# Altium PCB balancer.PcbDoc
Units mil, origin at the board's own origin, x right, y up, seen from the top; angles counter-clockwise.
Board outline 2235 x 3937.01 mil, 2 copper layers (Top Layer, Bottom Layer); 98 components, 77 nets, 398 pads, 157 vias.
Unrouted connection lines stored in the file: 1.
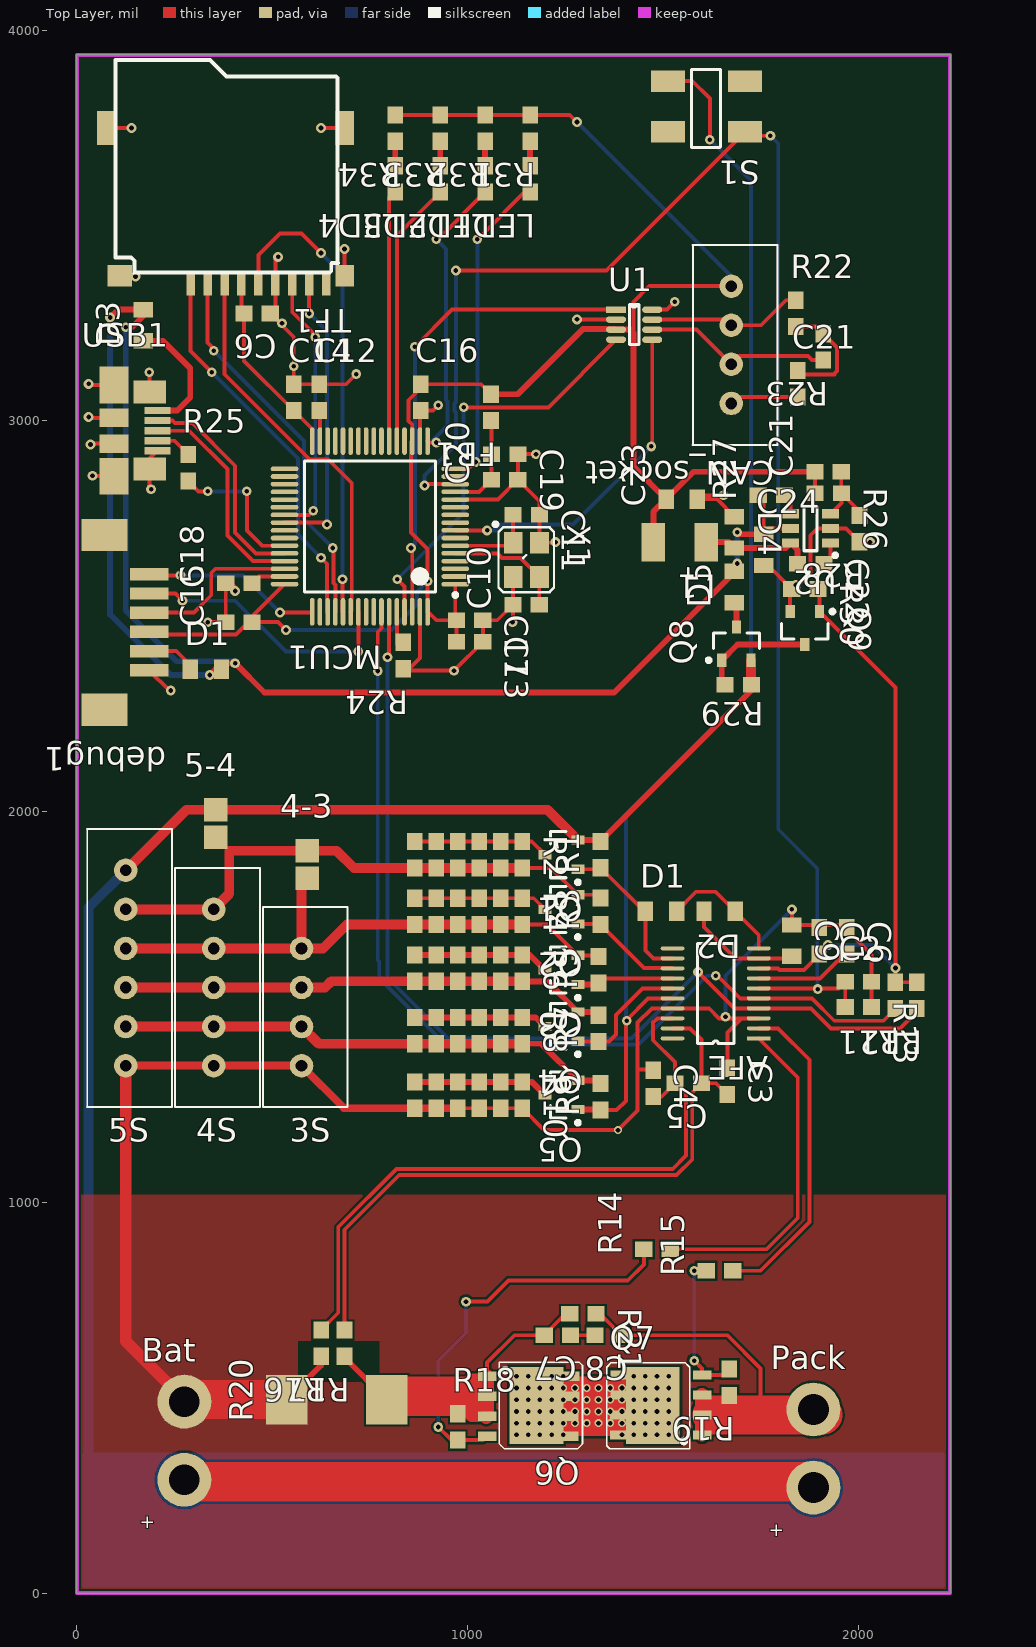
[diagram p0: Top Layer view]
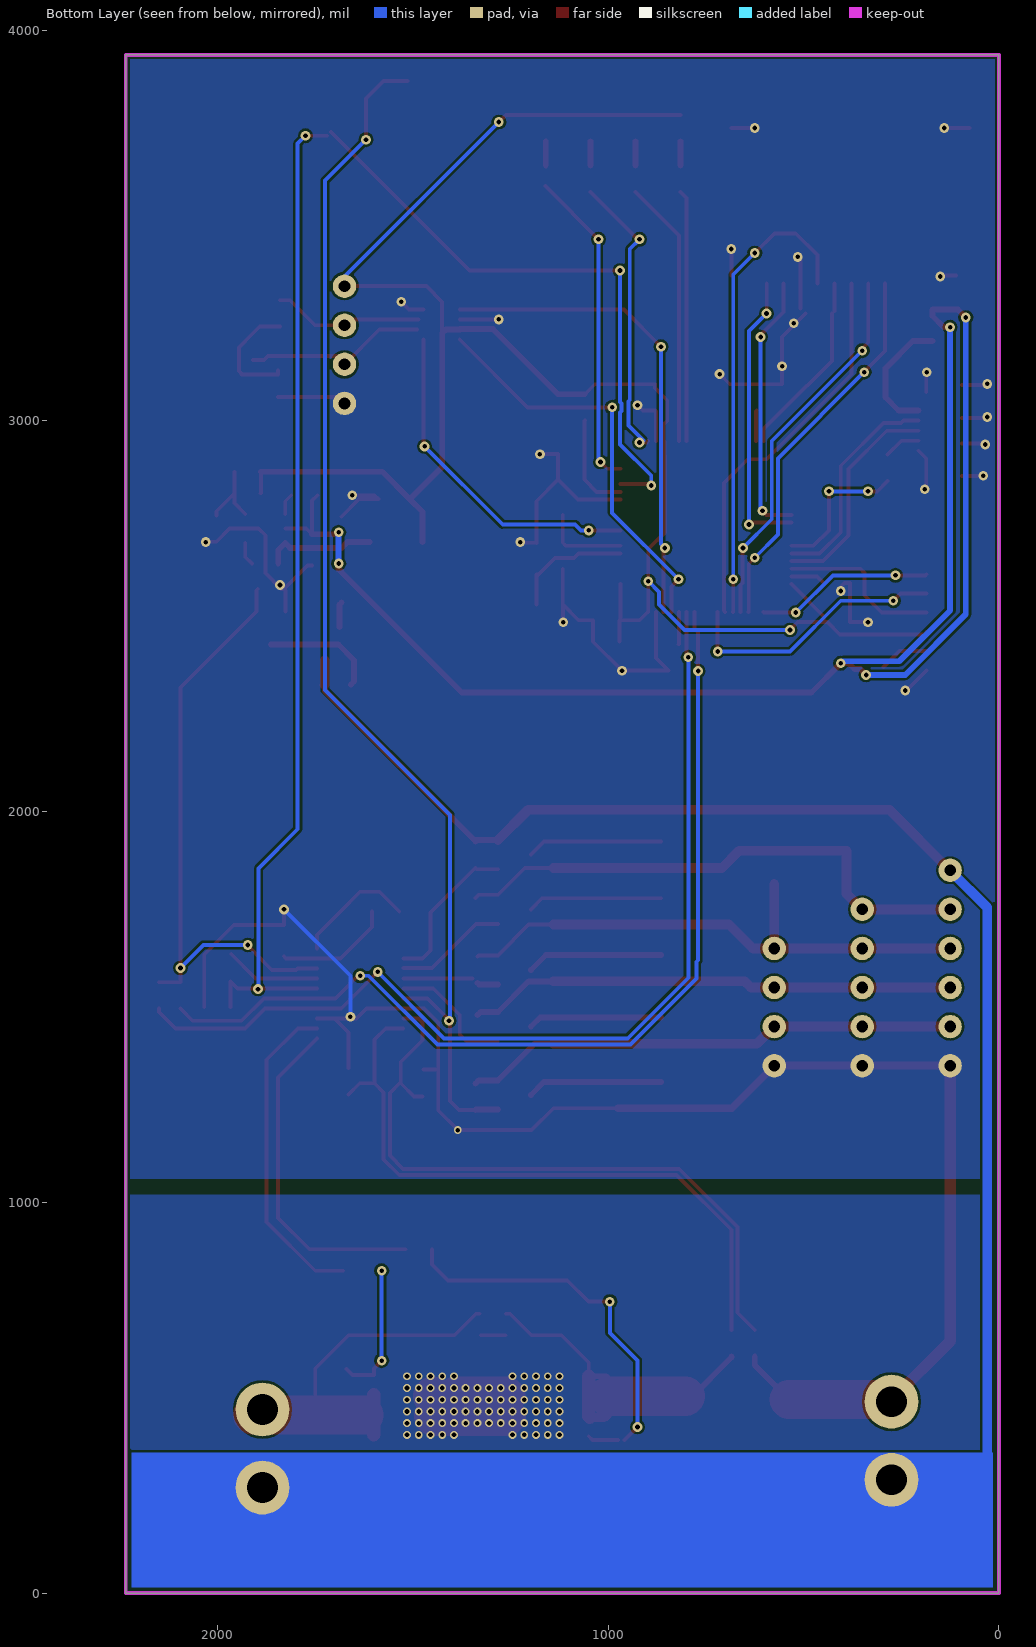
[diagram p1: Bottom Layer view, seen from below]

## Layer stack, top to bottom
Top Solder: solder mask 0.4, Solder Resist, Dk 3.5
Top Layer: signal copper 1.4
Dielectric 1: dielectric 12.6, FR-4, Dk 4.8
Bottom Layer: signal copper 1.4
Bottom Solder: solder mask 0.4, Solder Resist, Dk 3.5

## Board outline
0,0 0,3937.01 2235,3937.01 2235,0

## Design rules (kind name [scope] priority, off if disabled: settings)
Clearance [All] p1: gap=6
DiffPairsRouting [All] p1: maxlimit=10 minlimit=6 mostfreqgap=10 toplayer_minwidth=6 toplayer_maxwidth=15 toplayer_prefwidth=10 bottomlayer_minwidth=6 bottomlayer_maxwidth=15 bottomlayer_prefwidth=10 maxuncoupledlength=500
MinimumSolderMaskSliver [All] p1 off: minsoldermaskwidth=10
PolygonConnect [All] p1: connectstyle=Direct reliefconductorwidth=10 reliefentries=4 polygonreliefangle="90 Angle" airgapwidth=10
RoomDefinition Interface [InComponentClass('Interface')] p1 off: confinementstyle=ConfineIn formatcopy=TRUE lockcomponents=FALSE outline 3985,-40 4470,-40 4470,470 3985,470
RoomDefinition MCU [InComponentClass('MCU')] p2 off: confinementstyle=ConfineIn formatcopy=TRUE lockcomponents=FALSE outline 4270,-15 4435,-15 4435,210 4270,210
RoomDefinition AFE [InComponentClass('AFE')] p3 off: confinementstyle=ConfineIn formatcopy=TRUE lockcomponents=FALSE outline 4105,335 4405,335 4405,715 4105,715
RoutingVias [All] p1: holewidth=12 width=25 viastyle="Through Hole" minholewidth=12 minwidth=25 maxholewidth=28 maxwidth=50
SilkToBoardRegionClearance [All] p1 off:
SilkToSilkClearance [All] p1 off: silktosilkclearance=10
SilkToSolderMaskClearance [IsPad] p1 off: minsilkscreentomaskgap=10 clearancetoexposedcopper=TRUE
SolderMaskExpansion [All] p1: expansion=4
UnpouredPolygon [All] p1: allowunpoured=FALSE
Width [All] p1: maxlimit=100 minlimit=10 preferedwidth=10
24 further rules are at their usual default settings.

## Classes and differential pairs
component class MCU: C6 C10 C11 C12 C13 C14 C15 C16 C17 C18 C19 C20 C21 C22 C23 C24 CAN_socket D1 D3 D4 D5 debug1 FB1 L1 LED1 LED2 LED3 LED4 MCU1 MCU? Q8 Q9 R22 R23 R24 R25 R26 R27 R28 R29 R30 R31 R32 R33 R34 TF1 U1 U2 USB1 X1
component class AFE: AFE C1 C2 C3 C4 C5 C6 C7 C8 C9 D1 D2 Q1 Q2 Q3 Q4 Q5 Q6 Q7 R1 R2 R3 R4 R5 R6 R7 R8 R9 R10 R11 R12 R13 R14 R15 R16 R17 R18 R19 R20 R21 S1
component class Interface: 3S 4-3 4S 5-4 5S Bat Pack
differential pair USB: +USB_P -USB_N
differential pair CAN: +CAN_P -CAN_N

## Components (designator, comment, footprint, x,y, rotation, side; value= is the part's Value field where it differs from the comment)
3S "4PSocket" 4PSocket-s 575,1500 r270 top
4-3 "SW-SPST" "SolderBridge60mil - 2" 590,1830 r270 top
4S "5PSocket" 5PSocket 350,1600 r270 top
5-4 "SW-SPST" "SolderBridge60mil - 2" 355,1935 r270 top
5S "6PSocket" 6PSocket 125,1700 r270 top
AFE "BQ76920" TSSOP20 1635,1535 r180 top
Bat "Battery_AWG12" Battery_AWG12 275,390 r90 top
C1 "1uf" 0603 1900,1670 r270 top
C2 "4.7nF" 0603 2000,1565 r0 top
C3 "0.1uF" 0603 1665,1310 r270 top
C4 "0.1uF" 0603 1475,1305 r270 top
C5 "0.1uF" 0603 1565,1305 r180 top
C6 "0.1uf" 0603 461.54,3275 r180 top
C6 "1uf" 0603 1970,1670 r270 top
C7 "0.1uF" 0603 1230,660 r180 top
C8 "0.1uF" 0603 1360,660 r180 top
C9 "4.7uF" 0805 1830,1670 r270 top
C10 "20pF" 0603 1150,2530 r180 top
C11 "20pF" 0603 1150,2760 r0 top
C12 "2.2uf" 0603 620,3060 r90 top
C13 "0.1uF" 0603 1005,2435 r0 top
C14 "0.1uF" 0603 555,3060 r90 top
C15 "0.1uF" 0603 415,2485 r180 top
C16 "4.7uF" 0603 880,3060 r90 top
C17 "0.1uF" 0603 1005,2490 r0 top
C18 "2.2uf" 0603 415,2585 r180 top
C19 "0.1uF" 0603 1095,2915 r0 top
C20 "4.7uF" 0603 1095,2850 r180 top
C21 "100pF" 0603 1845,3095 r90 top
C21 "22pf" 0603 1923,2870 r180 top
C22 "0.1uF" 0603 1878,2635 r0 top
C23 "22uF" 0805 1548,2800 r180 top
C24 "4.7uF 50V" 0805 1758,2670 r90 top
CAN_socket "4PSocket" 4pSocket-s 1675,3195 r270 top
D1 "Diode" 0805 330,2365 r0 top
D1 "Diode" 0805 1495,1745 r0 top
D2 "Diode" 0805 1645,1745 r180 top
D3 "Diode" 0805 170,3245 r90 top
D4 "Diode" 0805 1683,2715 r270 top
D5 "Diode" 0805 1683,2575 r90 top
debug1 "debug" WFRSM125 185,2460 r270 top
FB1 "FB" 0603 1060,3035 r270 top
L1 "2.2uH" 1210 1543,2690 r180 top
LED1 "LED0" 0603 1160,3620 r270 top
LED2 "LED0" 0603 1045,3620 r270 top
LED3 "LED0" 0603 930,3620 r270 top
LED4 "LED0" 0603 815,3620 r270 top
MCU1 "STM32F103R8T6" LQFP64_N 750,2730 r180 top
Pack "Battery_AWG12" Battery_AWG12 1885,370 r90 top
Q1 "PMOS" SOT-23B_L 1240,1890 r180 top
Q2 "PMOS" SOT-23B_L 1240,1750 r180 top
Q3 "PMOS" SOT-23B_L 1240,1595 r180 top
Q4 "PMOS" SOT-23B_L 1240,1450 r180 top
Q5 "PMOS" SOT-23B_L 1240,1275 r180 top
Q6 "NMOS" BSC025N03MS 1175,480 r180 top
Q7 "NMOS" BSC025N03MS 1475,480 r0 top
Q8 "PMOS" SOT-23B_L 1688,2430 r90 top
Q9 "NMOS" SOT-23B_L 1863,2470 r270 top
R1 "10k" 0603 1340,1890 r90 top
R2 "200R" 0603*6 1030,1890 r270 top
R3 "10k" 0603 1340,1745 r90 top
R4 "200R" 0603*6 1030,1745 r270 top
R5 "10k" 0603 1335,1595 r90 top
R6 "200R" 0603*6 1030,1600 r270 top
R7 "10k" 0603 1335,1445 r90 top
R8 "200R" 0603*6 1030,1440 r270 top
R9 "10k" 0603 1340,1270 r90 top
R10 "200R" 0603*6 1030,1275 r270 top
R11 "10k" 0603 2095,1530 r270 top
R12 "10k" 0603 2150,1530 r270 top
R13 "NTC/10k" 0603 2000,1500 r0 top
R14 "200R" 0603 1485,880 r180 top
R15 "200R" 0603 1645,825 r180 top
R16 "0R" 0603 625,640 r270 top
R17 "0R" 0603 685,640 r270 top
R18 "500K" 0603 975,425 r90 top
R19 "500K" 0603 1670,540 r270 top
R20 "1mR" 2512 665,495 r180 top
R21 "NC" 0603 1295,715 r0 top
R22 "60R" 0603 1840,3275 r90 top
R23 "60R" 0603 1910,3190 r270 top
R24 "10k" 0603 835,2400 r270 top
R25 "10k" 0603 285,2880 r90 top
R26 "40.3k" 0603 1923,2815 r0 top
R27 "10k" 0603 1778,2810 r180 top
R28 "10k" 0603 2003,2725 r270 top
R29 "10k" 0603 1693,2325 r180 top
R30 "10k" 0603 1863,2570 r0 top
R31 "200R" 0603 1160,3750 r270 top
R32 "200R" 0603 1045,3750 r270 top
R33 "200R" 0603 930,3750 r270 top
R34 "200R" 0603 815,3750 r270 top
S1 "SW-PB" SW1 1710,3740 r180 top
TF1 "TF" TF 685,3750 r180 top
U1 "MAX3051" SOT-8 1380,3285 r0 top
U2 "MP2451" SOT-23-6L 1878,2725 r180 top
USB1 "USB Micro Type B" MOLEX-47346-0001 95,2975 r0 top
X1 "8mhz" OSCILLATOR-3.2X2.5 1150,2645 r270 top

## Footprints (in the part's own frame and the unit in brackets; to place one, negate y for a bottom-side part, rotate by r counter-clockwise, add the part's x,y. Pads: shape width x height; smd on the part's side, far side on the other; paste and mask are expansions set on the pad)
4PSocket-s [mil]
  round 60 hole 30: 1(-150,0) 2(-50,0) 3(50,0) 4(150,0)
  silkscreen extent -256,-99 256,118
4pSocket-s [mil]
  round 60 hole 30: 1(-150,0) 2(-50,0) 3(50,0) 4(150,0)
  silkscreen extent -256,-99 256,118
5PSocket [mil]
  round 60 hole 30: 1(-150,0) 2(-50,0) 3(50,0) 4(150,0) 5(250,0)
  silkscreen extent -256,-99 356,118
6PSocket [mil]
  round 60 hole 30: 1(-150,0) 2(-50,0) 3(50,0) 4(150,0) 5(250,0) 6(350,0)
  silkscreen extent -256,-99 456,118
0603 [mil] "0603-RES"
  rect 44x40 smd: 1(-33.46,0) 2(34,0)
0603*6 [mil] "0603-RES"
  rect 44x40 smd: 1(-33.46,110) 1(-33.46,55) 1(-33.46,0) 1(-33.46,-55) 1(-33.46,-110) 1(-33.46,-165) 2(34,110) 2(34,55) 2(34,0) 2(34,-55) 2(34,-110) 2(34,-165)
0805 [mil]
  rect 39.37x50 smd: 1(-40,0) 2(40,0)
  body extent -50,-30 50,30, height 31
1210 [mm]
  rect 1.52x2.5 smd: 1(-1.715,0) 2(1.715,0)
2512 [mm]
  rect 2.7x3.2 smd: 1(-3.25,0) 2(3.25,0)
Battery_AWG12 [mm]
  round 3.5 hole 2: 1(-2.54,0) 2(2.54,0)
BSC025N03MS [mm]
  rect 1.2x0.6 smd: D(-2.215,-0.605) D(-2.215,-1.905) D(-2.175,1.995) D(-2.175,0.695) G(3.175,1.995) S(3.175,-0.605) S(3.175,0.695) S(3.175,-1.905)
  rect 3.5x5 smd: D(-0.025,-0.005)
  silkscreen extent -3.02,-2.8 2.38,2.8
LQFP64_N [mm]
  oval 1.8x0.3 smd: 1(-5.55,3.75) 2(-5.55,3.25) 3(-5.55,2.75) 4(-5.55,2.25) 5(-5.55,1.75) 6(-5.55,1.25) 7(-5.55,0.75) 8(-5.55,0.25) 9(-5.55,-0.25) 10(-5.55,-0.75) 11(-5.55,-1.25) 12(-5.55,-1.75) 13(-5.55,-2.25) 14(-5.55,-2.75) 15(-5.55,-3.25) 16(-5.55,-3.75) 33(5.55,-3.75) 34(5.55,-3.25) 35(5.55,-2.75) 36(5.55,-2.25) 37(5.55,-1.75) 38(5.55,-1.25) 39(5.55,-0.75) 40(5.55,-0.25) 41(5.55,0.25) 42(5.55,0.75) 43(5.55,1.25) 44(5.55,1.75) 45(5.55,2.25) 46(5.55,2.75) 47(5.55,3.25) 48(5.55,3.75)
  oval 0.3x1.8 smd: 17(-3.75,-5.55) 18(-3.25,-5.55) 19(-2.75,-5.55) 20(-2.25,-5.55) 21(-1.75,-5.55) 22(-1.25,-5.55) 23(-0.75,-5.55) 24(-0.25,-5.55) 25(0.25,-5.55) 26(0.75,-5.55) 27(1.25,-5.55) 28(1.75,-5.55) 29(2.25,-5.55) 30(2.75,-5.55) 31(3.25,-5.55) 32(3.75,-5.55) 49(3.75,5.55) 50(3.25,5.55) 51(2.75,5.55) 52(2.25,5.55) 53(1.75,5.55) 54(1.25,5.55) 55(0.75,5.55) 56(0.25,5.55) 57(-0.25,5.55) 58(-0.75,5.55) 59(-1.25,5.55) 60(-1.75,5.55) 61(-2.25,5.55) 62(-2.75,5.55) 63(-3.25,5.55) 64(-3.75,5.55)
  silkscreen extent -5.68,-4.25 4.25,4.57
MOLEX-47346-0001 [mil] "MOLEX-47346-0001"
  rect 67x18 smd: 1(111,52) 2(111,26) 3(111,0) 4(111,-25.59) 5(111,-51.18)
  rect 75x94 smd: 5(0,-116.14) 5(0,117)
  rect 75x47 smd: 5(0,-32.97) 5(0,33)
  rect 83x59 smd: 5(91,-98.43) 5(91,99)
OSCILLATOR-3.2X2.5 [mil] "OSCILLATOR-3.2X2.5"
  rect 56x48 smd: 1(-43.31,-33.46) 2(44,-33.46) 3(44,34) 4(-43.31,34)
  silkscreen extent -95,-83 83,71
"SolderBridge60mil - 2" [mil]
  rect 60x60 smd: 1(-70,0) 2(0,0)
SOT-8 [mm]
  rect 1.3x0.42 smd: 1(0,0)
  oval 1.3x0.42 smd: 2(0,-0.65) 3(0,-1.3) 4(0,-1.95) 5(2.35,-1.95) 6(2.35,-1.3) 7(2.35,-0.65) 8(2.35,0)
  silkscreen extent 0.87,-2.28 1.48,0.33
SOT-23-6L [mm]
  rect 1.1x0.6 smd: 1(-1.3,0.95) 2(-1.3,0) 3(-1.3,-0.95) 4(1.3,-0.95) 5(1.3,0) 6(1.3,0.95)
  silkscreen extent -1.73,-1.45 0.43,1.87
SOT-23B_L [mm] "SOT23, 3-Leads, Body 2.9x1.3mm, Pitch 0.95mm, Lead Span 2.4mm, IPC High Density"
  rect 0.85x0.6 smd: 1(-1.075,0.95) 2(-1.075,-0.95) 3(1.075,0)
  silkscreen extent -1.2,-1.5 0.7,1.92, body extent -0.7,-1.5 0.7,1.5, height 1.14
SW1 [mm]
  rect 2.2x1.4 smd: 1(0,0) 2(5,-3.3) 3(5,0) 4(0,-3.3)
  silkscreen extent 1.6,-4.06 3.47,1.02
TF [mm]
  rect 0.55x1.6 smd: 1(10,10.1) 2(8.9,10.1) 3(7.8,10.1) 4(6.7,10.1) 5(5.6,10.1) 6(4.5,10.1) 7(3.4,10.1) 8(2.3,10.1) 9(1.2,10.1)
  rect 1.2x1.4 smd: SHELL(0,9.6)
  rect 1.2x2.2 smd: SHELL(0,0) SHELL(15.5,0)
  rect 1.6x1.4 smd: SHELL(14.6,9.6)
  silkscreen extent 0.41,-4.42 14.9,9.4
TSSOP20 [mm]
  rect 1.55x0.25 smd: 1(-2.8,2.925)
  oval 1.55x0.25 smd: 2(-2.8,2.275) 3(-2.8,1.625) 4(-2.8,0.975) 5(-2.8,0.325) 6(-2.8,-0.325) 7(-2.8,-0.975) 8(-2.8,-1.625) 9(-2.8,-2.275) 10(-2.8,-2.925) 11(2.8,-2.925) 12(2.8,-2.275) 13(2.8,-1.625) 14(2.8,-0.975) 15(2.8,-0.325) 16(2.8,0.325) 17(2.8,0.975) 18(2.8,1.625) 19(2.8,2.275) 20(2.8,2.925)
  silkscreen extent -1.19,-3.25 1.19,3.25
WFRSM125 [mm]
  rect 0.81x2.5 smd: 1(-3.75,0) 2(-2.5,0) 3(-1.25,0) 4(0,0) 5(1.25,0) 6(2.5,0)
  rect 2.1x3 smd: shell(-6.3,-2.9) shell(5.05,-2.9)
  body extent -6.79,-3.82 5.46,0.38, height 3.4

## Part data
4-3 5-4: "Single-Pole, Single-Throw Switch"
C1 C2 C3 C4 C5 C6 C6 C7 C8 C9 C10 C11 C12 C13 C14 C15 C16 C17 C18 C19 C20 C21 C21 C22 C23 C24: library part CAP0402-CAP, "电容"
D1 D1 D2 D3 D4 D5: "Default Diode"
FB1 R1 R2 R3 R4 R5 R6 R7 R8 R9 R10 R11 R12 R13 R14 R15 R16 R17 R18 R19 R20 R21 R22 R23 R24 R25 R26 R27 R28 R29 R30 R31 R32 R33 R34: library part Res2, "电阻"
L1: library part Inductor, "Inductor"
LED1 LED2 LED3 LED4: "Typical INFRARED GaAs LED"
MCU1: "STM32 ARM-based 32-bit MCU with 64 Kbytes Flash, 64-pin LQFP, Industrial Temperature"
S1: "Switch"
USB1: library part USB_Micro_TypeB, "Connector SMD USB Micro Type B middle mount"
X1: library part OSCILLATOR-3.2X2.5, "Crystal Oscillator in 3.2x2.5 SMD"

## Via types
v1: diameter 25, hole 12, Top Layer to Bottom Layer, 80 vias
v2: diameter 20, hole 12, Top Layer to Bottom Layer, 77 vias

## Nets (pads, with @x,y where several pads share a name; then routed paths per layer and width w, separated by ;. In a path a pad name is that pad's centre, name@x,y a point inside that pad or via, vN(x,y) a via of type N, cw(c..) or ccw(c..) an arc to the next point about the centre after c; other vN are vias at no path point)
3.3: C6.2@427.54,3275 C13.1 C14.1 C15.1 C16.2 C17.1 C21.2@1889,2870 C23.2 CAN_socket.1 debug1.4 FB1.1 L1.2 MCU1.1 MCU1.19 MCU1.32 MCU1.48 MCU1.64 R26.1 R31.1 R32.1 R33.1 R34.1 TF1.4 U1.3 | length 5335.9
  Top Layer w10: debug1.4 185,2454 407.56,2454 438.56,2485 C15.1 ; C6.2@421.22,3281.32 TF1.4 ; C6.2@427.54,3275 427.54,3154 C14.1 602.36,2979.17 MCU1.32 ; MCU1.48 448.46,2499.33 C15.1 ; v1(535,2465) 515,2485 C15.1 ; R34.1 R33.1 R32.1 R31.1 1261.54,3783.46 v1(1280,3765) ; MCU1.64 v1(897.64,2590) 897.64,2672.36 855,2715 855,2911.49 855.49,2911.97 855.49,2945.72 MCU1.19 858.27,2990.71 849,2999.98 849,3053.09 880,3084.09 C16.2 1034.46,3094 FB1.1 ; MCU1.64@898.86,2511.5 920.35,2490 C17.1 C13.1 ; C17.1@968.5,2493.03 MCU1.1 ; 1425,3225 1425,3305 1465,3345 CAN_socket.1 ; C21.2@1889,2870 1889,2815.54 R26.1
  Top Layer w15: FB1.1 1128.46,3068.46 1295,3235 1378.82,3235 U1.3 1416.18,3233.82 1425,3225 1425,2883 C23.2 ; L1.2 1475.48,2767.48 C23.2 ; C21.2@1889,2870 1578,2870 C23.2
  Bottom Layer w10: v1(535,2465) 805,2465 870,2530 870,2562.36 v1(897.64,2590) ; v1(1280,3765) 1675,3370 CAN_socket.1
CAN_N: CAN_socket.3 R23.2 U1.6 | length 469.6
  Top Layer w10: U1.6@1490,3233.82 1586.18,3233.82 CAN_socket.3 1696,3166 1871.21,3166 1881.21,3156 R23.2
CAN_P: CAN_socket.2 R22.2 U1.7 | length 387.5
  Top Layer w10: U1.7@1485,3259.41 1660.59,3259.41 CAN_socket.2 1751,3245 1815,3309 R22.2
GND: 3S.4 4S.5 5S.6 AFE.3 AFE.17 Bat.2 C1.1 C2.2 C3.1 C4.1 C6.1 C9.1 C10.2 C11.2 C12.2 C13.2 C14.2 C15.2 C16.1 C17.2 C18.2 C19.2 C20.1 C21.1@1845,3061.54 C23.1 C24.1 CAN_socket.4 D4.1 debug1.6 MCU1.12 MCU1.18 MCU1.63 Q9.2 R10.2 R13.2 R16.2 R20.2 R24.2 R28.2 R30.1 TF1.6 TF1.SHELL U1.2 U1.8 U2.2 USB1.5 X1.2 X1.4 | length 7996.4
  Top Layer w10: v1(30,3010) 32,3008 USB1.5@95,3008 ; v1(30,3095) 33,3092 USB1.5@95,3092 ; v1(35,2940) 37.03,2942.03 USB1.5@95,2942.03 ; v1(40,2860) 41.14,2858.86 USB1.5@95,2858.86 ; TF1.SHELL@74.76,3750 v1(140,3750) ; TF1.SHELL@110.2,3372.05 147.95,3372.05 v1(150,3370) ; debug1.6 236.57,2310 v1(240,2310) ; v1(185,3125) 186,3124 USB1.5@186,3074 ; v1(190,2825) 186,2829 186,2876.57 186,2903.82 USB1.5@206,2923.82 ; v1(335,2485) C15.2 C18.2 395,2585 408,2572 408,2565 v1(405,2565) ; C6.1@495,3275 555,3215 v1(555,3140) C14.2 C12.2 689,3094 v1(715,3120) ; C6.1@507.83,3287.83 TF1.6 507.83,3412.83 v1(515,3420) ; v1(625,3750) TF1.SHELL@685,3750 ; TF1.SHELL@685,3372.05 v1(685,3440) ; MCU1.63 877.95,2392.95 846,2361 v1(965,2361) C13.2 C17.2 1076,2490 C10.2 ; MCU1.18 877.95,3024.49 C16.1 911.54,3026.54 v1(925,3040) ; MCU1.12 1077.36,2798.9 C20.1 ; R10.2@975,1241 1030,1241 1085,1241 1140,1241 1196,1185 v2(1385,1185) 1435,1235 1435,1340 ; v1(1115,2485) 1116,2486 C10.2 ; X1.2@1116.54,2620.84 X1.2 1116.54,2530.54 C10.2 ; v1(1175,2915) C19.2 1129,2850.54 C20.1 ; X1.4@1184,2688.22 X1.4 ; v1(1225,2690) 1223.31,2688.31 X1.4 ; v1(1280,3260) 1379.41,3260 U1.2 ; U1.8 1510,3285 v1(1530,3305) ; C4.1@1473.46,1340 1435,1340 ; v1(1655,2810) 1598,2810 C23.1 1638,2800 D4.1 ; C3.1 1665,1435 1701.02,1471.02 ; CAN_socket.4 1691.54,3061.54 C21.1@1845,3061.54 ; AFE.3 1701.02,1471.02 ; C24.1 1769.54,2630 R30.1 ; Q9.2 1825.6,2566.06 R30.1 ; v1(1830,1750) C9.1 1958.46,1710 2034,1634.46 C2.2 R13.2 ; v1(1840,2580) 1839.54,2580 R30.1 ; v1(2030,2690) 2029,2691 R28.2 1969,2725 U2.2 1895,2725 1877.54,2707.54 1877.54,2610.44 1837.09,2570 R30.1 ; C20.1 1184,2794.46 C11.2 X1.4 ; 1435,1340 1435,1460 1471.61,1496.61 AFE.17 1618.39,1496.61 1643.98,1471.02 1701.02,1471.02
  Top Layer w15: R20.2 625,582.95 R16.2
  Top Layer w20: 5S.6 3S.4 684,1241 865,1241 920,1241 R10.2@975,1241
  Top Layer w30: 5S.6 125,645 Bat.2@275,495
  Top Layer w100: Bat.2@275,495 R20.2
  Bottom Layer w10: v1(1660,1475) 1660,1580 v1(1830,1750)
  other v1: 525,3250
Net3S_1: 3S.1 4-3.2 4S.2 5S.3 Q3.2 R4.2 R5.2 | length 1434.2
  Top Layer w10: R4.2@1140,1711 1203.72,1711 Q3.2 1331.6,1632.4 R5.2
  Top Layer w25: 5S.3 4S.2 3S.1 ; 4-3.2@575,1815 3S.1 ; R4.2@1140,1711 1085,1711 1030,1711 975,1711 920,1711 865,1711 691,1711 630,1650 3S.1
Net3S_2: 3S.2 4S.3 5S.4 Q4.2 R6.2 R7.2 | length 1252.5
  Top Layer w15: R6.2@1140,1565.69 1204.04,1565.69 Q4.2 1326.6,1487.4 R7.2
  Top Layer w25: 5S.4 4S.3 3S.2 635,1550 651,1566 865,1566 920,1566 975,1566 1030,1566 1085,1566 R6.2@1140,1566
Net3S_3: 3S.3 4S.4 5S.5 Q5.2 R8.2 R9.2 | length 1275.5
  Top Layer w15: R8.2@1140,1406 1188.72,1406 Q5.2 1331.6,1312.4 R9.2
  Top Layer w25: 5S.5 4S.4 3S.3 619,1406 865,1406 920,1406 975,1406 1030,1406 1085,1406 R8.2@1140,1406
Net4-3_1: 4-3.1 4S.1 5-4.2 5S.2 Q2.2 R2.2 R3.2 | length 1391.7
  Top Layer w10: R2.2@1140,1856 1213.72,1856 Q2.2 1331.6,1787.4 R3.2
  Top Layer w25: 5S.2 4S.1 390,1790 390,1900 4-3.1 665,1900 709,1856 865,1856 920,1856 975,1856 1030,1856 1085,1856 R2.2@1140,1856
Net5-4_1: 5-4.1 5S.1 Bat.1 Pack.1 Q1.2 Q8.2 R1.2 R29.1 | length 5167.1
  Top Layer w15: Q1.2 R1.2@1336.6,1927.4 ; R1.2 1725.4,2309.4 R29.1@1725.4,2326.06
  Top Layer w25: 5S.1 280,2005 5-4.1 1204.72,2005 Q1.2 ; Q8.2 1725.4,2326.06 R29.1
  Top Layer w100: Bat.1@270,285 Pack.1@1885,285
  Bottom Layer w25: 30,270 30,535 30,1755 5S.1
NetAFE_1: AFE.1 R14.1 | length 860.8
  Top Layer w10: R14.1 1765,880 1845,960 1845,1320.08 AFE.1
NetAFE_2: AFE.2 R15.1 | length 826.4
  Top Layer w10: R15.1 1750,825 1875,950 1875,1365 1794.57,1445.43 AFE.2
NetAFE_4: AFE.4 MCU1.59 R12.2 | length 2513.9
  Top Layer w10: v1(795,2395) 799.21,2399.21 MCU1.59 ; v1(1590,1590) 1683.39,1496.61 AFE.4 1878.42,1496.61 1930.04,1445 2107.21,1445 2150,1487.79 R12.2
  Bottom Layer w10: v1(795,2395) 795,1575 950,1420 1420,1420 v1(1590,1590)
NetAFE_5: AFE.5 MCU1.58 R11.2 | length 2468.3
  Top Layer w10: v1(770,2360) 770,2459.96 779.53,2469.49 MCU1.58 ; v1(1635,1580) 1640,1580 1697.8,1522.2 AFE.5 1881.12,1522.2 1938.32,1465 2064,1465 R11.2
  Bottom Layer w10: v1(770,2360) 770,1620 774,1616 774,1573.37 943.37,1404 1437.23,1404 1613.23,1580 v1(1635,1580)
NetAFE_6: AFE.6 C2.1 MCU1.14 R13.1 S1.1 | length 4135.7
  Top Layer w10: v1(890,2835) 893.27,2838.27 MCU1.14 ; v1(970,3385) 1355,3385 S1.1 ; S1.1@1720,3730 v1(1775,3730) ; AFE.6 1949.33,1547.8 C2.1 R13.1
  Bottom Layer w10: v1(890,2835) 890,2860 970,2940 970,3021.77 966.5,3025.27 966.5,3044.73 970,3048.23 v1(970,3385) ; v1(1775,3730) 1795,3710 1795,1955 1895,1855 1895,1547.21 v1(1896.33,1545.89)
NetAFE_7: AFE.7 C6.2@1970,1636 | length 245.7
  Top Layer w10: AFE.7 1902.39,1573.39 C6.2@1965,1636
NetAFE_8: AFE.8 C1.2 Q9.1 R11.1 R12.1 R30.2 | length 1549.7
  Top Layer w10: AFE.8 1795.13,1598.98 1798.79,1595.31 1861.21,1595.31 1900,1634.1 C1.2 1901,1636 1923.96,1658.96 v1(1922.5,1658.96) ; R30.2 1900.4,2566.6 Q9.1 2095,2317.72 v1(2095,1600) R11.1 R12.1
  Bottom Layer w10: v1(1922.5,1658.96) 2036.04,1658.96 v1(2095,1600)
NetAFE_9: AFE.9 C9.2 D2.2 | length 300.6
  Top Layer w10: D2.2 1605,1705 1685.43,1624.57 AFE.9 1824.57,1624.57 C9.2
NetAFE_10: AFE.10 D1.2@1535,1745 D2.1 | length 311.2
  Top Layer w10: D1.2@1535,1745 1585,1795 1635,1795 D2.1 1745.24,1684.76 AFE.10
NetAFE_12: AFE.12 D1.1@1455,1745 Q1.1 R1.1 | length 391.1
  Top Layer w10: Q1.1 R1.1@1336.06,1852.6 ; R1.1 1455,1741.54 1455,1645 1475.43,1624.57 AFE.12
NetAFE_13: AFE.13 Q2.1 R3.1 | length 288.1
  Top Layer w10: Q2.1 1338.94,1712.6 R3.1 1451.54,1600 AFE.13@1523.74,1600
NetAFE_14: AFE.14 Q3.1 R5.1 | length 232.2
  Top Layer w10: R5.1@1346.85,1573.39 AFE.14
  Top Layer w15: Q3.1 1331.06,1557.6 R5.1
NetAFE_15: AFE.15 Q4.1 R7.1 | length 327.1
  Top Layer w10: Q4.1@1283.39,1411.54 R7.1 1361.54,1411.54 1380,1430 1380,1480 1447.8,1547.8 AFE.15
NetAFE_18: AFE.18 C4.2 C5.2 R16.1 | length 1748.3
  Top Layer w10: R16.1 669,717.46 669,936.63 818.37,1086 1525,1086 1559,1120 1559,1280 1534,1305 C5.2 ; C4.2 1497,1271 C5.2 ; AFE.18 1486.02,1471.02 1475,1460 1475,1415 1531,1359 C5.2
NetAFE_19: AFE.19 C3.2 C5.1 R17.1 | length 1701.6
  Top Layer w10: R17.1 685,930 825,1070 1535,1070 1575,1110 1575,1281.54 C5.1 ; AFE.19 1569.57,1445.43 1598.46,1416.54 C5.1 ; C3.2 1636,1305 C5.1
NetAFE_20: AFE.20
NetC7_1: C7.1 C8.2 | length 62.5
  Top Layer w10: C7.1 C8.2
NetC7_2: C7.2 Q6.S R17.2 R18.2 R20.1 R21.1 | length 906.7
  Top Layer w10: Q6.S@1050,555 1050,590 1120,660 C7.2 1251,715 R21.1
  Top Layer w15: R17.2 685,602.95 R20.1 ; 1000,503.82 1000,550 1005,555 Q6.S@1050,555
  Top Layer w25: 1001,459 1010,450 Q6.S@1047.36,450
  Top Layer w35: Q6.S@1047.36,450 1050,452.64 1050,503.82 Q6.S@1050,555
  Top Layer w100: R20.1@801.77,503.82 1000,503.82
NetC8_1: C8.1 Pack.2 Q7.S R19.2 R21.2 | length 985.2
  Top Layer w10: R21.2 1338.46,715 C8.1 1665,660 1750,575 1750,456.18
  Top Layer w35: Q7.S@1600,405 1600,456.18 Q7.S@1600,507.36
  Top Layer w100: 1625,456.18 1750,456.18 Pack.2@1910,456.18
NetC10_1: C10.1 MCU1.5 X1.3 | length 317.4
  Top Layer w10: MCU1.5 1076.19,2661.1 1087.98,2649.31 1135.78,2649.31 X1.3@1183.46,2601.63 ; C10.1 X1.3@1183.46,2601.63 ; X1.3 1184,2601.09 X1.3@1183.46,2601.63 ; X1.3@1184,2606.75 1183.46,2606.21 X1.3@1183.46,2601.63
NetC11_1: C11.1 MCU1.6 X1.1 | length 222.8
  Top Layer w10: MCU1.6 1109.02,2680.79 X1.1 C11.1
NetC12_1: C12.1 MCU1.31 | length 78.9
  Top Layer w10: C12.1 622.05,3024.49 MCU1.31
NetC18_1: C18.1 MCU1.47 | length 90.1
  Top Layer w10: C18.1 465.51,2602.05 MCU1.47
NetC19_1: C19.1 C20.2 FB1.2 MCU1.13 | length 256.9
  Top Layer w10: MCU1.13 1029.58,2818.58 C20.2 1061,3000 FB1.2
NetC21_1: C21.1@1956.46,2870 R26.2 R28.1 U2.3 | length 194.9
  Top Layer w10: U2.3 1957,2790.22 R26.2 ; C21.1@1956.46,2870 1956.46,2815.54 R26.2 ; R28.1 2003,2769 R26.2
NetC21_2: C21.2@1845,3129 R22.1 R23.1 | length 302.9
  Top Layer w10: R22.1 1891.93,3241.54 R23.1 1945,3188.46 1945,3127.79 1939,3121.79 1939,3119 1845,3119 C21.2@1845,3129
NetC22_1: C22.1 D4.2 L1.1 U2.6 | length 287.7
  Top Layer w15: L1.1 1668,2690 D4.2 1814.22,2675 U2.6 1844.54,2669.88 C22.1
NetC22_2: C22.2 U2.1 | length 59.7
  Top Layer w10: C22.2 1929.18,2652.18 U2.1
NetD1_1: D1.1@290,2365 debug1.5 | length 126.9
  Top Layer w10: debug1.5 254.21,2410.79 D1.1@295,2370
NetD3_1: D3.1 USB1.1 | length 321.7
  Top Layer w15: D3.1 220,3205 290,3135 290,3060 257,3027 USB1.1
NetD5_1: D5.1 Q8.3 | length 64.7
  Top Layer w15: D5.1 1688,2530 Q8.3
Netdebug1_1: debug1.1 MCU1.49 | length 458.4
  Top Layer w10: debug1.1 187.64,2605 v1(265,2605) ; v1(520,2510) 600.87,2510 MCU1.49
  Bottom Layer w10: v1(265,2605) 425,2605 v1(520,2510)
Netdebug1_2: debug1.2 MCU1.55 | length 698.2
  Top Layer w10: debug1.2 251.93,2558.43 v1(270.36,2540) ; v1(720,2410) 720.47,2410.47 MCU1.55
  Bottom Layer w10: v1(270.36,2540) 405,2540 535,2410 v1(720,2410)
Netdebug1_3: debug1.3 MCU1.46 | length 426.6
  Top Layer w10: debug1.3 185.79,2510 300,2510 344,2554 344,2611.21 354.52,2621.73 MCU1.46
NetLED1_1: LED1.1 R31.2 | length 62.5
  Top Layer w15: LED1.1 R31.2
NetLED1_2: LED1.2 MCU1.16 | length 826
  Top Layer w10: MCU1.16 1002.64,2877.64 v1(1020,2895) ; v1(1025,3465) LED1.2@1161,3601
  Bottom Layer w10: v1(1020,2895) 1025,2895 v1(1025,3465)
NetLED2_1: LED2.1 R32.2 | length 62.5
  Top Layer w15: LED2.1 R32.2
NetLED2_2: LED2.2 MCU1.17 | length 753.8
  Top Layer w10: MCU1.17 901.14,2945 v1(920,2945) ; v1(920,3465) 924,3465 LED2.2
  Bottom Layer w10: v1(920,2945) 915,2950 910,2950 948.5,2988.5 948.5,3049.73 945,3053.23 945,3440 v1(920,3465)
NetLED3_1: LED3.1 R33.2 | length 62.5
  Top Layer w15: LED3.1 R33.2
NetLED3_2: LED3.2 MCU1.21 | length 683.5
  Top Layer w10: MCU1.21 818.9,3474.9 LED3.2
NetLED4_1: LED4.1 R34.2 | length 62.5
  Top Layer w15: LED4.1 R34.2
NetLED4_2: LED4.2 MCU1.22 | length 644
  Top Layer w10: MCU1.22 799.21,3570.21 LED4.2
NetMCU1_8: MCU1.8 U1.5 | length 864.9
  Top Layer w10: MCU1.8 968.66,2720 v1(1050,2720) ; v1(1470,2935) 1472.52,2937.52 U1.5
  Bottom Layer w10: v1(1050,2720) 1070,2720 1085,2735 1270,2735 v1(1470,2935)
NetMCU1_39: MCU1.39 TF1.7 | length 696.7
  Top Layer w10: MCU1.39 594.53,2759.53 v1(605,2770) ; TF1.7 551.14,3278.86 610,3220 v1(610,3215)
  Bottom Layer w10: v1(605,2770) 610,2765 v1(610,3215)
NetMCU1_40: MCU1.40 TF1.8 | length 746.7
  Top Layer w10: MCU1.40 635.16,2739.84 v1(640,2735) ; TF1.8 594.45,3275.55 v1(595,3275)
  Bottom Layer w10: v1(595,3275) 640,3230 v1(640,2735)
NetMCU1_43: MCU1.43 R25.1 | length 373.7
  Top Layer w10: R25.1 311.54,2820 v1(335,2820) ; v1(435,2820) 435,2720 474.21,2680.79 MCU1.43
  Bottom Layer w10: v1(335,2820) v1(435,2820)
NetMCU1_51: MCU1.51 TF1.1 | length 986.7
  Top Layer w10: TF1.1 291.3,3178.7 v1(345,3125) ; v1(625,2650) 640.5,2634.5 640.5,2511.5 MCU1.51
  Bottom Layer w10: v1(345,3125) 565.5,2904.5 565.5,2709.5 v1(625,2650)
NetMCU1_52: MCU1.52 TF1.2 | length 976.2
  Top Layer w10: TF1.2 334.61,3200.39 350,3185 v1(350,3180) ; v1(655,2675) 656.5,2673.5 656.5,2585.27 661.42,2580.35 MCU1.52
  Bottom Layer w10: v1(350,3180) 581.5,2948.5 581.5,2748.5 v1(655,2675)
NetMCU1_53: MCU1.53 TF1.5 | length 1218.1
  Top Layer w10: TF1.5 464.53,3424.53 520,3480 575,3480 v1(625,3430) ; v1(680,2595) 680,2512.6 MCU1.53
  Bottom Layer w10: v1(625,3430) 680,3375 v1(680,2595)
NetMCU1_54: MCU1.54 TF1.3 | length 1004.7
  Top Layer w10: TF1.3 377.91,3119.52 595.36,2902.07 642.93,2902.07 703.5,2841.5 703.5,2514.21 MCU1.54
NetMCU1_60: MCU1.60 R24.1 | length 83.5
  Top Layer w10: MCU1.60 818.9,2429.57 R24.1@820,2428.46
NetMCU1_61: MCU1.61 U1.4 | length 1063.4
  Top Layer w10: v1(820,2595) 838.58,2576.42 MCU1.61 ; v1(990,3035) 1206.77,3035 U1.4
  Bottom Layer w10: v1(820,2595) 990,2765 v1(990,3035)
NetMCU1_62: MCU1.62 U1.1 | length 1238.4
  Top Layer w10: v1(855,2675) 858.27,2671.73 MCU1.62 ; v1(865,3190) 960,3285 U1.1
  Bottom Layer w10: v1(855,2675) 865,2685 v1(865,3190)
NetQ1_D: Q1.3 R2.1 | length 346.5
  Top Layer w10: R2.1@865,1923.46 920,1923.46 975,1923.46 1030,1923.46 1085,1923.46 1140,1923.46 1164.21,1923.46 Q1.3
NetQ2_D: Q2.3 R4.1 | length 344.5
  Top Layer w10: R4.1@865,1778.46 920,1778.46 975,1778.46 1030,1778.46 1085,1778.46 1140,1778.46 1169.21,1778.46 Q2.3
NetQ3_D: Q3.3 R6.1 | length 348.6
  Top Layer w15: R6.1@865,1633.46 920,1633.46 975,1633.46 1030,1633.46 1085,1633.46 1140,1633.46 1159.21,1633.46 Q3.3
NetQ4_D: Q4.3 R8.1 | length 342.4
  Top Layer w15: R8.1@865,1473.46 920,1473.46 975,1473.46 1030,1473.46 1085,1473.46 1140,1473.46 1174.21,1473.46 Q4.3
NetQ5_D: Q5.3 R10.1 | length 346.5
  Top Layer w15: R10.1@865,1308.46 920,1308.46 975,1308.46 1030,1308.46 1085,1308.46 1140,1308.46 1164.21,1308.46 Q5.3
NetQ6_D: Q6.D Q7.D | length 316.5
  Top Layer w100: Q6.D@1260.63,452.64 Q7.D@1446.85,452.64 ; Q6.D@1262.21,503.82 Q7.D@1389.37,503.82 ; Q7.D@1446.85,503.82 Q7.D@1450,503.82
  other v2: 1125,405 1155,405 1185,405 1215,405 1245,405 1395,405 1425,405 1455,405 1485,405 1515,405 1125,435 1155,435 1185,435 1215,435 1245,435 1275,435 1305,435 1335,435 1365,435 1395,435 1425,435 1455,435 1485,435 1515,435 1125,465 1155,465 1185,465 1215,465 1245,465 1275,465 1305,465 1335,465 1365,465 1395,465 1425,465 1455,465 1485,465 1515,465 1125,495 1155,495 1185,495 1215,495 1245,495 1275,495 1305,495 1335,495 1365,495 1395,495 1425,495 1455,495 1485,495 1515,495 1125,525 1155,525 1185,525 1215,525 1245,525 1275,525 1305,525 1335,525 1365,525 1395,525 1425,525 1455,525 1485,525 1515,525 1125,555 1155,555 1185,555 1215,555 1245,555 1395,555 1425,555 1455,555 1485,555 1515,555
NetQ6_G: Q6.G R14.2 R18.1 | length 1010.2
  Top Layer w10: v1(925,425) R18.1@958.46,391.54 ; R18.1 1040.08,391.54 Q6.G ; v1(996,746) 1051,746 1105,800 1410,800 1451,841 R14.2
  Bottom Layer w10: v1(925,425) 925,595 996,666 v1(996,746)
NetQ7_G: Q7.G R15.2 R19.1 | length 350.9
  Top Layer w10: v1(1580,595) 1600,575 Q7.G 1655.08,558.54 R19.1
  Bottom Layer w10: v1(1580,595) v1(1580,825)
NetQ8_G: Q8.1 Q9.3 R29.2 | length 295.1
  Top Layer w15: R29.2 1650.6,2333.4 Q8.1 1690.6,2427.68 Q9.3
NetR25_2: R25.2 USB1.4 | length 93.7
  Top Layer w10: USB1.4 249.59,2949.41 R25.2
NetR27_1: R27.1 U2.4 | length 54
  Top Layer w10: R27.1 1826.82,2794.65 U2.4
USB_N: MCU1.44 USB1.2 | length 566.2
  Top Layer w10: USB1.2 244.5,3001 250.5,2995 295.5,2995 405,2885.5 405,2715 458.9,2661.1 MCU1.44
USB_P: MCU1.45 USB1.3 | length 563.5
  Top Layer w10: USB1.3 287.21,2975 385,2877.21 385,2706.72 450.3,2641.42 MCU1.45
VBOOT: AFE.16 Q5.1 R9.1 S1.2 | length 3142.1
  Top Layer w10: R9.1 1381.54,1236.54 1405,1260 v1@1405,1465 ; v1@1406.25,1466.25 1462.2,1522.2 AFE.16 ; S1.2 1575.08,3869.92 1620,3825 v1(1620,3720)
  Top Layer w15: Q5.1 1338.94,1237.6 R9.1
  Bottom Layer w10: v1(1407.5,1465) 1405,1467.5 1405,1991.77 1725,2311.77 1725,3615 v1(1620,3720)
VMCU: C24.2 D1.2@370,2365 D3.2 D5.2 R27.2 U2.5 | length 4178.4
  Top Layer w10: R27.2 1758,2796 C24.2 1773,2725 U2.5
  Top Layer w15: v1(85,3265) 105,3285 D3.2 170,3268.78 141.22,3240 v1(125,3240) ; v1(340,2350) 355,2365 370,2365 385,2380 v1(405,2380) 480,2305 1375,2305 D5.2@1683,2613 ; D5.2 D5.2@1683,2613 ; v1(1690,2635) 1690,2620 D5.2@1683,2613 ; v1(1690,2715) 1695,2710 C24.2
  Bottom Layer w15: v1(85,3265) 85,2505 240,2350 v1(340,2350) ; v1(125,3240) 125,2515 255,2385 400,2385 v1(405,2380) ; v1(1690,2635) v1(1690,2715)
pads on no net: AFE.11 debug1.shell MCU1.2 MCU1.3 MCU1.4 MCU1.7 MCU1.9 MCU1.10 MCU1.11 MCU1.15 MCU1.20 MCU1.23 MCU1.24 MCU1.25 MCU1.26 MCU1.27 MCU1.28 MCU1.29 MCU1.30 MCU1.33 MCU1.34 MCU1.35 MCU1.36 MCU1.37 MCU1.38 MCU1.41 MCU1.42 MCU1.50 MCU1.56 MCU1.57 S1.3 S1.4 TF1.9

## Polygon pours and split planes (outlines as drawn)
GND on Bottom Layer "Top Layer-No Net" (solid, remove dead copper, pour order 2): 0,3937.01 2235,3937.01 2235,1060 0,1060
NetQ6_D on Bottom Layer "Top Layer-No Net" (solid, remove dead copper, pour order 10): 0,1025 5,1020 2235,1020 2235,365 0,365
GND on Top Layer "Top Layer-No Net" (solid, remove dead copper, pour order 8): 0,1020 2235,1020 2235,0 10,0 0,10

## Keep-outs
Keep-Out Layer:
  the board outline again, w10

## Other copper
Top Layer:
  pour cut-out: 565,645.46 775,645.46 775,540 565,540
  pour cut-out: 150,1160 155,1155 2360,1155 2360,1035 2355,1030 150,1030
Bottom Layer:
  rectangle net Net5-4_1: 15,15 2220,360

## Silkscreen, mask and mechanical layers (free items; w line width, h text height)
Top Solder:
  lines w100: 270,285 1885,285

## Text inside footprints (layer, text, board x,y; h text height)
Bat: Top Overlay "+" at 195,200 h35 r90
Pack: Top Overlay "+" at 1805,180 h35 r90
U2: Mechanical 15 "1" at 1860.29,2731.47 h29.53 r270